# Altium PCB Example.PcbDoc (part 2 of 2)
Units mm, origin at the board's own origin, x right, y up, seen from the top; angles counter-clockwise.
Board outline 168.2 x 69.2 mm, 2 copper layers (Top Layer, Top, Bottom Layer, Bottom), stack 1.71 mm thick; 73 components, 24 nets, 188 pads, 846 vias.
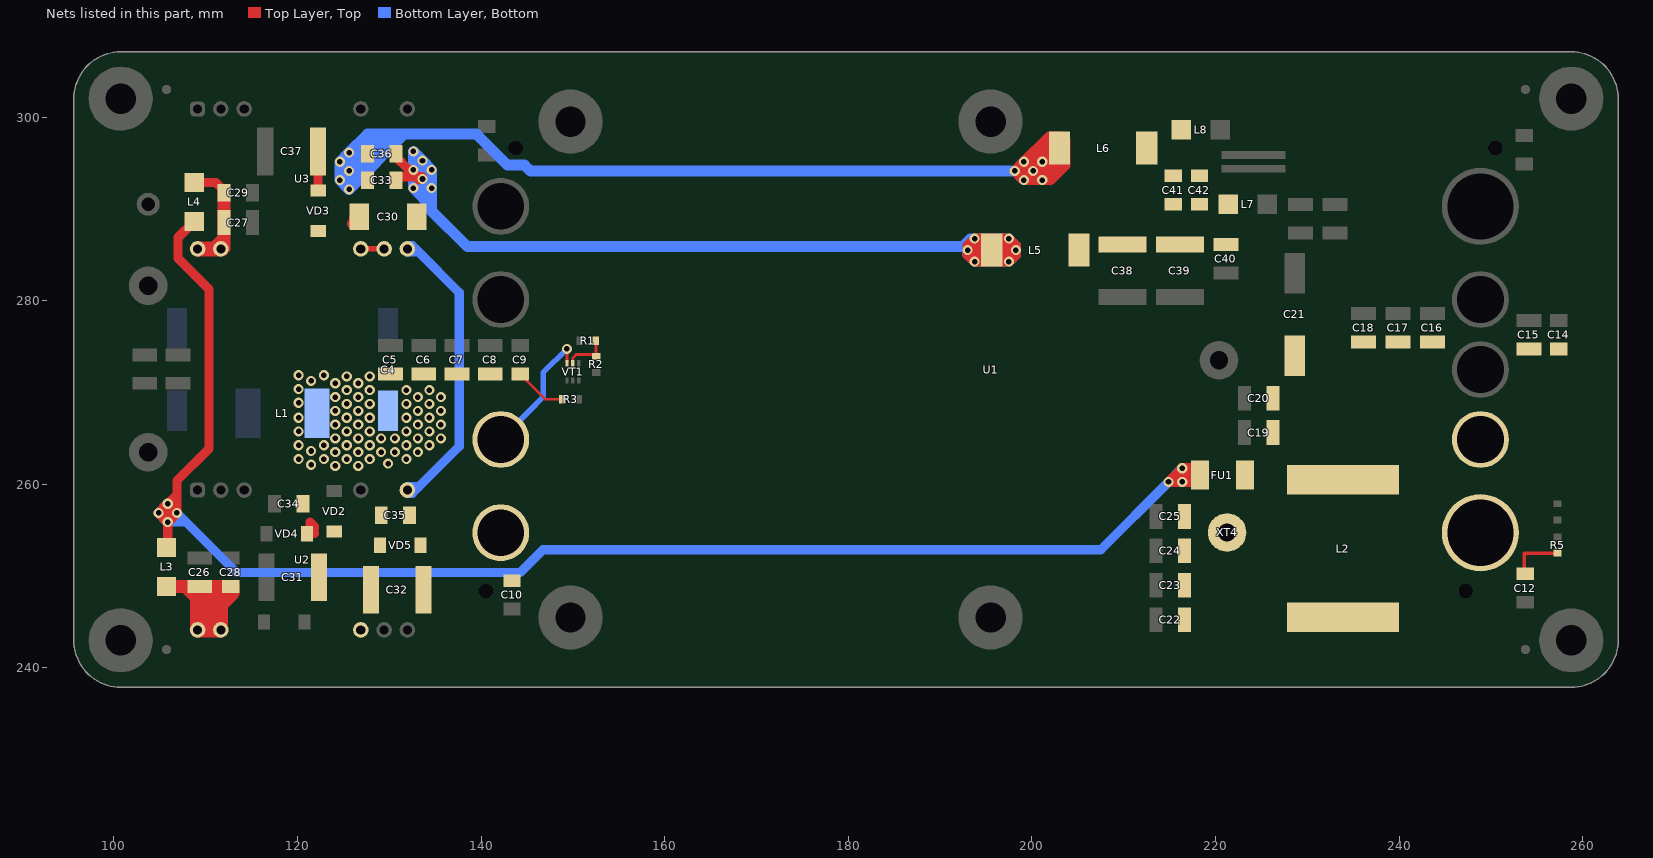
[diagram p2: the nets of this part, all layers, seen from the top]

## Via types
v1: diameter 1.1, hole 0.6, Top Layer, Top to Bottom Layer, Bottom, 846 vias

## Nets (pads, with @x,y where several pads share a name; then routed paths per layer and width w, separated by ;. In a path a pad name is that pad's centre, name@x,y a point inside that pad or via, vN(x,y) a via of type N, cw(c..) or ccw(c..) an arc to the next point about the centre after c; other vN are vias at no path point) (continued)
NET00006: C30.1 C32.2 C33.1 C35.2 C36.1 C37.2 L5.1 U2.11 U3.14 VD3.C VD5.A | length 182.8
  Top Layer, Top w1: VD3.C@122.25,292 C37.2@122.25,296.25 ; C33.1@130.75,293.125 130.5,293.375 130.5,293.5 133.125,293.5 ; C36.1@130.75,296 130.625,295.875 130.625,295.75 v1@132.188,294.187 ; v1@133.25,293.125 v1@133.375,293.25 ; v1@132.188,294.187 v1@132.25,294.125 ; v1@132.188,294.187 132.125,294.125 v1@132.25,294.125 ; v1@132.188,294.187 132.25,294.25 v1(132.625,294.25) v1@132.5,294.125 ; v1@132.25,294.125 v1@132.5,294.125 ; v1@132.5,294.125 133.125,293.5 ; 133.125,293.5 v1@133.375,293.5 ; v1@133.375,293.25 v1@133.5,293.375 ; v1@133.375,293.25 v1(133.625,293.25) ; v1@133.375,293.5 v1@133.625,293.5 ; v1@133.375,293.5 v1@133.5,293.375 ; v1@133.5,293.375 v1@133.625,293.5 ; v1@133.5,293.375 v1(133.625,293.25) ; v1(133.625,293.25) v1@133.625,293.5
  Top Layer, Top w1.1: v1@193.75,284.375 v1(193.75,284.25) ; L5.1@195.625,285.5 L5.1@195.625,285 ; v1@193,285 L5.1@195.625,285 ; v1@193,285 v1(193,285.5) v1@193,286 ; v1@193,285 v1(193.75,284.25) ; v1@193,286 v1@198.25,286 ; v1@193,286 v1(193.75,286.75) v1(197.5,286.75) v1@198.25,286 ; v1(193.75,284.25) L5.1@195.625,284.25 ; L5.1@195.625,284.25 v1(197.5,284.25) v1@198.25,285 ; L5.1@195.625,284.25 L5.1@195.625,285 ; L5.1@195.625,285 v1@198.25,285 ; v1@198.25,285 v1(198.25,285.5) v1@198.25,286
  Bottom Layer, Bottom w1: U3.14@131.99,285.635 U3.14@131.985,285.635 131.985,285.31 131.975,285.3 133.2,285.3 ; U3.14@131.99,285.635 132,285.625 U3.14@132,285.635 ; U3.14@131.99,285.635 U3.14@132,285.635 ; U3.14@132,285.635 132,285.975 132.525,285.975 132.865,285.635 ; U3.14@132,285.635 132.865,285.635 ; 132.865,285.635 133.2,285.3 ; 133.2,285.3 137.625,280.875 137.625,264.125 133.225,259.725 ; 133.225,259.725 132,259.725 131.985,259.71 U2.11@131.985,259.375 131.985,259.035 131.975,259.025 132.525,259.025 133.225,259.725
  Bottom Layer, Bottom w1.1: v1@133.125,294.25 v1(134.625,294.25) ; v1@133.375,293 v1(133.625,293.25) ; v1@192.625,285.875 192.5,286 ; v1(193.75,284.25) v1(197.5,284.25) v1@198.25,285 ; 192.5,286 193.25,286.75 v1(193.75,286.75) v1(197.5,286.75) v1@198.25,286 ; 192.5,286 v1@193,286 ; v1@193,286 v1@198.25,286 ; v1@193,286 193,285.875 v1(193,285.5) 193,285 v1@198.25,285 ; v1@198.25,285 v1(198.25,285.5) v1@198.25,286
  Bottom Layer, Bottom w1.2: v1@133.375,293 v1@133.625,292.75 ; 193.75,285.875 193,285.875 192.625,285.875 138.5,285.875 134.625,289.75 134.625,290.25 ; v1(132.625,294.25) v1(132.625,296.25) v1(133.625,295.25) v1(134.625,294.25) ; v1(132.625,294.25) v1(132.625,292.25) 134.625,290.25 ; v1(132.625,294.25) 133.125,294.25 v1@133.875,293.5 ; v1@133.625,292.75 v1@134.625,291.75 ; v1@133.625,292.75 v1(133.625,293.25) v1@133.875,293.5 ; v1@133.875,293.5 v1(134.625,294.25) ; 134.625,290.25 v1@134.625,291.75 ; v1@134.625,291.75 v1(134.625,292.25) v1(134.625,294.25)
NET00007: C31.2 C32.1 C34.2 C35.1 U2.16 VD2.C VD4.A VD5.C | length 3.8
  Top Layer, Top w1: VD4.A@121.025,254.625 VD4.A@121.375,254.975 ; 121.875,254.625 121.375,254.625 VD4.A@121.375,254.975 ; VD4.A@121.375,254.975 121.375,255.875 121.875,255.375 121.875,255.1 121.5,255.1 VD4.A@121.375,254.975
NET00009: C12.1 C14.1 C15.1 C16.1 C17.1 C18.1 C19.1 C20.1 C21.A FU1.2 L2.2 R5.2 U1.8 U1.9 | length 5.9
  Top Layer, Top w0.4: C12.1@253.75,250.25 253.625,250.375 253.625,252.5 R5.2@257.25,252.5
NET00010: C30.2 C33.2 C36.2 L6.1 U3.15 U3.16 VD3.A | length 160.3
  Top Layer, Top w0.6: U3.16@126.905,285.635 U3.15@129.44,285.635
  Top Layer, Top w1: C30.2@125.875,288.375 C30.2@126,288.375 ; U3.15@129.44,285.635 129.45,285.625 U3.15@129.445,285.635 ; C30.2@126,288.375 126.75,288.375 C30.2@126.75,289.125 ; C30.2@126,288.375 C30.2@126.125,288.5 ; C30.2@126,288.375 C30.2@126.125,288.5 ; C30.2@126.125,288.5 126.125,289.08 126.17,289.125 C30.2@126.75,289.125 ; C30.2@126.125,288.5 C30.2@126.75,289.125 ; U3.16@126.875,285.625 126.875,285.665 U3.16@126.905,285.635 126.885,285.635 U3.16@126.875,285.625
  Top Layer, Top w1.1: v1(198.125,294.125) v1(200.125,294.125) 201.375,294.125 201.5,294 201.857,294.327 L6.1@203,295.375 ; v1(198.125,294.125) v1(199.125,293.125) v1(201.125,293.125) 202,293.125 203.625,294.75 203.625,297.5 203.25,297.875 L6.1@203.125,297.875 ; v1(198.125,294.125) v1(199.125,295.125) ; v1(199.125,295.125) v1(201.125,295.125) ; v1(199.125,295.125) 201.875,297.875 L6.1@202.75,297.875 ; v1(201.125,295.125) v1@201.125,295.375 ; v1(201.125,295.125) v1@201.375,295.375 ; v1@201.125,295.375 v1@201.375,295.375 ; v1@201.125,295.375 200.375,295.375 200.375,295.5 200.562,295.688 202.25,297.375 L6.1@202.75,297.875 ; v1@201.375,295.375 202.875,296.875 202.875,296.75 L6.1@203,296.625 203,295.75 203.062,295.688 203.062,295.437 L6.1@203,295.375 ; v1@201.375,295.375 L6.1@203,295.375 ; L6.1@202.75,297.875 L6.1@203.125,297.875 ; L6.1@203,295.375 203.125,295.375 L6.1@203.125,297.875
  Bottom Layer, Bottom w1.1: v1(198.125,294.125) v1(200.125,294.125) 201.125,294.125 ; v1(198.125,294.125) v1(199.125,295.125) v1(201.125,295.125) 201.125,294.125 ; v1(198.125,294.125) v1(199.125,293.125) v1(201.125,293.125) 201.125,294.125
  Bottom Layer, Bottom w1.2: v1(198.125,294.125) 145.375,294.125 144.75,294.75 142.875,294.75 139.5,298.125 131.625,298.125 ; v1(125.625,292.125) v1(124.625,293.125) v1(124.625,295.125) v1(125.625,296.125) ; v1(125.625,292.125) 125.625,293 ; v1(125.625,292.125) 131.625,298.125 ; 125.625,293 v1(125.625,294.125) v1@125.625,294.5 ; 125.625,293 126.187,293.562 130.75,298.125 ; v1@125.625,294.5 v1(125.625,296.125) ; v1@125.625,294.5 126.437,295.313 129.25,298.125 ; v1(125.625,296.125) 127.625,298.125 129.25,298.125 ; 129.25,298.125 130.75,298.125 ; 130.75,298.125 131.625,298.125
NET00012: C27.1 C29.1 L4.2 U3.22 U3.23 | length 32.4
  Top Layer, Top w0.9: U3.22@111.635,285.635 U3.22@111.665,285.635 ; C27.1@112,288.5 112,285.875 111.76,285.635 U3.22@111.665,285.635 ; U3.23@109.125,285.625 109.125,285.25 U3.22@111.625,285.25 ; U3.23@109.125,285.625 U3.23@109.125,285.635 109.125,286 110.875,286 ; U3.23@109.125,285.625 110.5,285.625 ; 110.5,285.625 U3.22@111.625,285.625 ; 110.5,285.625 U3.22@111.625,285.635 ; 110.5,285.625 110.875,286 ; 110.875,286 111.625,286 U3.22@111.625,285.635 ; 110.875,286 111.75,286.875 111.75,291.75 111.75,292.25 112.25,292.25 112.25,285.625 112,285.375 112,285.5 111.875,285.5 111.837,285.462 U3.22@111.625,285.25 ; U3.22@111.625,285.25 U3.22@111.625,285.625 ; U3.22@111.625,285.625 U3.22@111.635,285.635 ; U3.22@111.625,285.625 U3.22@111.625,285.635 ; U3.22@111.625,285.635 U3.22@111.635,285.635 ; U3.22@111.635,285.635 U3.22@111.665,285.635
  Top Layer, Top w1: L4.2@108.75,292.875 111.125,292.875 111.75,292.25 112,292 C29.1@112,291.75
NET00013: C4.A C5.1 C6.1 C7.1 C8.1 C9.1 C10.1 L1.2 R3.1 U1.1 | length 5.8
  Top Layer, Top w0.3: C9.1@144.25,272 147,269.25 R3.1@148.875,269.25
  other v1: 124.125,262 126.625,262 121.5,262.125 129.875,262.25 120.125,262.75 122.875,262.75 125.375,262.75 127.875,262.75 131.875,262.75 124.125,263.5 126.625,263.5 129.125,263.5 130.625,263.5 133.125,263.5 121.5,263.625 120.125,264.25 122.875,264.25 125.375,264.25 127.875,264.25 131.875,264.25 134.375,264.25 124.125,265 126.625,265 129.125,265 130.625,265 133.125,265 135.625,265 120.125,265.75 125.375,265.75 127.875,265.75 131.875,265.75 134.375,265.75 124.125,266.5 126.625,266.5 133.125,266.5 135.625,266.5 120.125,267.25 125.375,267.25 127.875,267.25 131.875,267.25 134.375,267.25 124.125,268 126.625,268 133.125,268 135.625,268 125.375,268.75 127.875,268.75 131.875,268.75 134.375,268.75 120.125,268.875 124.125,269.5 126.625,269.5 133.125,269.5 135.625,269.5 125.375,270.25 127.875,270.25 131.875,270.25 134.375,270.25 120.125,270.375 124.125,271 126.625,271 121.5,271.25 125.375,271.75 127.875,271.75 120.125,271.875 122.875,271.875
NET00014: FU1.1 L3.1 L4.1 | length 189.2
  Top Layer, Top w1: L3.1@105.75,253.125 105.875,253.125 v1(105.875,255.875) ; v1(105.875,257.875) 106.875,258.875 ; v1(106.875,256.875) 106.875,258.875 ; L4.1@108.75,288.625 107,286.875 107,284.625 110.375,281.25 110.375,263.875 106.875,260.375 106.875,258.875
  Top Layer, Top w1.1: v1(105.875,255.875) v1(104.875,256.875) v1(105.875,257.875) ; v1(105.875,255.875) v1(106.875,256.875) v1(105.875,257.875) ; v1(105.875,255.875) v1(105.875,257.875) ; 215.75,261.125 v1(216.375,261.75) FU1.1@218.25,261.75 ; 215.75,261.125 v1(214.875,260.25) v1(216.375,260.25) 218.25,260.25 FU1.1@218.25,261.125 ; 215.75,261.125 FU1.1@218.25,261.125 ; FU1.1@218.25,261.125 FU1.1@218.272,261.147 ; FU1.1@218.25,261.125 FU1.1@218.25,261.17 ; FU1.1@218.25,261.17 FU1.1@218.25,261.75 ; FU1.1@218.25,261.17 FU1.1@218.272,261.147 ; FU1.1@218.25,261.75 218.295,261.705 FU1.1@218.295,261.17 ; FU1.1@218.272,261.147 FU1.1@218.295,261.17 ; FU1.1@218.272,261.147 218.272,261.023 FU1.1@218.295,261 FU1.1@218.295,261.17
  Bottom Layer, Bottom w1: v1(105.875,255.875) 107.875,255.875 ; v1(106.875,256.875) 107.875,255.875 ; v1(214.875,260.25) 207.5,252.875 146.75,252.875 144.25,250.375 113.375,250.375 107.875,255.875
  Bottom Layer, Bottom w1.1: v1(105.875,255.875) v1(104.875,256.875) v1(105.875,257.875) ; v1(105.875,255.875) v1(106.875,256.875) v1(105.875,257.875) ; v1(105.875,255.875) v1(105.875,257.875) ; v1(214.875,260.25) v1(216.375,260.25) v1(216.375,261.75) v1(214.875,260.25)
NET00015: R1.1 R2.2 VT1.2 | length 5.3
  Top Layer, Top w0.3: VT1.2@150,273.2 150,273.75 150.375,274.125 R2.2@152.525,274.125 ; R1.1@152.5,275.625 152.525,275.6 R2.2@152.525,274.125 ; R2.2@152.525,274.125 152.525,273.95 R2.2@152.55,273.925 152.6,273.975 152.6,274 152.625,274 152.625,274.125 R2.2@152.525,274.125
NET00024: C26.1 C28.1 L3.2 U2.22 U2.23 | length 32.4
  Top Layer, Top w1.4: L3.2@105.5,248.875 107.75,248.875 ; U2.22@111.665,244.135 111.74,244.135 U2.22@111.74,244.115 ; 107.75,248.875 109,247.625 ; 107.75,248.875 C26.1@108.5,248.875 ; C26.1@108.5,248.75 108.375,248.75 C26.1@108.5,248.875 ; C26.1@108.5,248.75 C26.1@108.625,248.75 ; C26.1@108.5,248.75 108.25,248.5 C26.1@108.875,248.5 ; C26.1@108.5,248.75 C26.1@108.625,248.875 ; C26.1@108.5,248.875 C26.1@108.625,248.875 ; C26.1@108.625,248.75 C26.1@108.75,248.875 ; C26.1@108.625,248.75 C26.1@108.875,248.75 ; C26.1@108.625,248.875 C26.1@108.75,248.875 ; C26.1@108.75,248.875 C26.1@108.875,248.75 ; C26.1@108.75,248.875 C26.1@109.375,248.875 ; C26.1@108.875,248.5 108.875,248.375 109,248.375 109,247.625 ; C26.1@108.875,248.5 C26.1@108.875,248.75 ; C26.1@108.875,248.5 C26.1@109.125,248.75 ; C26.1@108.875,248.75 C26.1@109.125,248.75 ; 109,247.625 109,244.125 U2.23@109.115,244.125 ; U2.23@109.115,244.125 U2.23@109.125,244.135 U2.23@109.125,244.115 ; U2.23@109.115,244.125 U2.23@109.125,244.115 ; U2.23@109.125,244.115 109.125,244 110.375,244 ; C26.1@109.125,248.75 109.25,248.75 C26.1@109.375,248.875 ; C26.1@109.375,248.875 C26.1@110.125,248.875 ; C26.1@110.125,248.875 110.375,248.625 110.375,244 ; C26.1@110.125,248.875 111.75,248.875 ; 110.375,244 111.625,244 U2.22@111.74,244.115 ; U2.22@111.74,244.115 111.75,244.125 111.75,246.875 ; 111.75,246.875 113,248.125 113,248.875 C28.1@112.75,248.875 111.75,248.875 ; 111.75,246.875 111.75,248.875
NET00029: U1.2 VT1.3 | length 14.4
  Top Layer, Top w0.3: VT1.3@149.35,273.2 v1(149.35,274.75)
  Bottom Layer, Bottom w0.6: U1.2@142.15,264.875 145.25,268 146.75,269.5 146.75,272.15 v1(149.35,274.75)
NET00031: C38.2 C39.2 C40.2 C41.1 C42.1 L5.2 L7.1
NET00032: C41.2 C42.2 L6.2 L8.1
OUT+27V: C22.1 C23.1 C24.1 C25.1 L2.1 XT4.1
pads on no net: U1.3 U1.12 U1.13 U1.14 U1.15 U2.4 U2.15 U3.2 U3.4 U3.9 U3.11
copper on no net: | length 4.4
  Top Layer, Top w1.1: 193,285 193.75,284.25 193,285
  Bottom Layer, Bottom w1.1: 192.125,285.875 193,285 193.75,284.25

## Polygon pours and split planes (outlines as drawn)
no net on Top Layer, Top "Top Layer, Top-GND 8" (solid, pour order 108): 106.553,233.45 103.803,233.45 103.803,224.325
IN-27V on Top Layer, Top "Top Layer, Top-IN-27V" (solid, pour order 0): 144.125,293.875 144.125,294.25 142.375,296 139,296 137.25,294.25 137.25,293.875
GND on Top Layer, Top "Top Layer, Top-GND" (solid, pour order 2): 257.25,293 257.25,293.375 255.625,295 251.625,295 251.625,294 252.625,293
NET00009 on Top Layer, Top "Top Layer, Top-NET00009" (solid, pour order 4): 258.5,273 258.5,275.375 258.375,275.5 252.625,275.5 252.5,275.375 252.5,273.5 252.75,273.25 253,273.25 253,273.375 252.875,273.5 252.875,273.875 253,274 253.75,274 253.875,273.875 253.875,273.5 253.75,273.375 253.75,273.25 254.375,273.25 254.375,273.375 254.25,273.5 254.25,273.875 254.375,274 255.125,274 255.25,273.875 255.25,273.5 255.125,273.375 255.125,273.25 255.875,273.25 255.875,273.375 255.75,273.5 255.75,273.875 255.875,274 256.625,274 256.75,273.875 256.75,273.5 256.625,273.375 256.625,273.25 257.25,273.25 257.25,273.375 257.125,273.5 257.125,273.875 257.25,274 258,274 258.125,273.875 258.125,273.5 258,273.375 258,272.875 258.375,272.875
NET00009 on Top Layer, Top "Top Layer, Top-NET00009 1" (solid, pour order 6): 251.75,252.125 251.75,250.125 255.375,250.125 256,250.75 256,252.125
NET00006 on Top Layer, Top "Top Layer, Top-NET00006" (solid, pour order 8): 131.25,259.375 131.25,258.5 131.625,258.125 131.625,256.375 131.875,256.125 131.875,246.75 132.625,246 134.5,246 134.625,246.125 134.625,257.75 132.625,259.75 131.625,259.75
OUT+27V on Top Layer, Top "Top Layer, Top-OUT+27V" (solid, pour order 10): 216.375,243.25 216.625,243 219.5,243 219.5,258 218.875,258.625 216.5,258.625 216.375,258.5
GND on Top Layer, Top "Top Layer, Top-GND 1" (solid, pour order 12): 259.875,245.125 263.125,245.125 263.125,298.75 259.875,298.75 259.875,291.75 259.875,263.75
GND on Top Layer, Top "Top Layer, Top-GND 2" (solid, pour order 14): 144.375,297.875 144.375,298.625 144.375,304.625 132.75,304.625 132.75,303.5 138.625,297.625 142.625,297.625 142.875,297.875
GND on Top Layer, Top "Top Layer, Top-GND 3" (solid, pour order 16): 258.375,277.125 258.5,277.25 258.5,279.375 258,279.375 258,279.25 258.125,279.125 258.125,278.75 258,278.625 256.875,278.625 256.75,278.75 256.75,279.125 256.875,279.25 256.875,279.375 256.25,279.375 256.25,279.25 256.375,279.125 256.375,278.75 256.25,278.625 255,278.625 254.875,278.75 254.875,279.125 255.125,279.375 255.125,279.5 254.25,279.5 254.25,279.375 254.5,279.125 254.5,278.75 254.375,278.625 253.125,278.625 253,278.75 253,279.125 253.25,279.375 253.25,279.5 252.375,279.5 252.375,279.375 252.625,279.125 252.625,277.625 252.5,277.5 252.125,277.5 251.875,277.75 251.375,277.75 251.375,277.125
IN+27V on Top Layer, Top "Top Layer, Top-IN+27V" (solid, pour order 18): 108.5,271.625 108.375,271.75 101.875,271.75 101.75,271.625 101.75,263.5 103.75,261.5 105.25,261.5 108.5,264.75
GND on Top Layer, Top "Top Layer, Top-GND 4" (solid, pour order 20): 114.5,284.875 115.125,284.875 117.25,287 117.25,298.75 113.625,298.75 112.375,300 112.375,300.875 111,300.875 111,296.5 114.5,293
GND on Top Layer, Top "Top Layer, Top-GND 5" (solid, pour order 22): 109,303.875 109,306.375 99.5,306.375 98,305.875 96.875,304.75 96.375,303.25 96.375,293.75 98.875,293.75
NET00013 on Top Layer, Top "Top Layer, Top-NET00013" (solid, pour order 24): 139.75,251.5 139.75,251.125 141.5,249.375 145.125,249.375 146.75,251 146.75,251.5
NET00009 on Top Layer, Top "Top Layer, Top-NET00009 2" (solid, pour order 26): 245.75,275.625 245.625,275.75 234.375,275.75 233.75,276.375 231,276.375 230.375,277 227,277 226,275.875 226,261.75 234.625,261.75 234.625,268.75 234.875,269 245,269 245,273.75 245.75,274.5
NET00009 on Top Layer, Top "Top Layer, Top-NET00009 3" (solid, pour order 28): 226.875,258.75 239.875,258.75 240,258.875 240,262.625 234.125,268.5 227.875,268.5 227.875,264.25 225.625,262 223.125,262 223.125,260 225.625,260
GND on Top Layer, Top "Top Layer, Top-GND 6" (solid, pour order 30): 251.625,303.375 260,295 263.125,295 263.125,303.25 262.625,304.75 261.5,305.875 260,306.375 251.625,306.375
GND on Top Layer, Top "Top Layer, Top-GND 7" (solid, pour order 32): 258.75,296.625 258.75,297.25 254.125,301.875 251.125,301.875 251.125,298.25 251.875,297.5 251.875,297 252.25,296.625
GND on Top Layer, Top "Top Layer, Top-GND 8" (solid, pour order 34): 99.125,250.875 96.375,250.875 96.375,241.75 96.875,240.25 98,239.125 99.5,238.625 108.5,238.625 108.5,241.5
GND on Top Layer, Top "Top Layer, Top-GND 9" (solid, pour order 36): 108.15,251.4 113.875,251.4 114.825,250.45 114.825,244.8 115.5,244.125 117.275,244.125 118.075,244.925 118.075,258.7 116.1,258.7 115.025,257.625 113.4,257.625 112.4,258.625 112.4,262.55 111.875,262.55 108.45,259.125 108.45,254.3 108.15,254
IN-27V on Top Layer, Top "Top Layer, Top-IN-27V 1" (solid, pour order 38): 108.5,280.25 105.125,283.625 103.75,283.625 101.75,281.625 101.75,273.5 101.875,273.375 108.375,273.375 108.5,273.5
GND on Top Layer, Top "Top Layer, Top-GND 10" (solid, pour order 40): 145.375,247.75 141.875,247.75 136,241.875 136,240.5 145.375,240.5
GND on Top Layer, Top "Top Layer, Top-GND 11" (solid, pour order 42): 211.875,259.125 211.875,241 216.25,241 216.25,241.625 215,242.875 215,258.375 213.625,259.75 212.5,259.75
OUT+27V on Top Layer, Top "Top Layer, Top-OUT+27V 1" (solid, pour order 44): 218.375,243 239.25,243 240,243.75 240,247.75 237.5,250.25 221.75,250.25 221.625,250.375 221.625,250.75 221.75,250.875 223.875,250.875 225.25,252.25 225.25,256.875 223.5,258.625 218.375,258.625
GND on Top Layer, Top "Top Layer, Top-GND 12" (solid, pour order 46): 251.375,241.375 251.375,238.625 260,238.625 261.5,239.125 262.625,240.25 263.125,241.75 263.125,250.25 260.25,250.25
GND on Top Layer, Top "Top Layer, Top-GND 13" (solid, pour order 48): 96.375,246.75 99.625,246.75 99.625,296 96.375,296
NET00006 on Top Layer, Top "Top Layer, Top-NET00006 1" (solid, pour order 50): 130.125,291.625 131.375,290.375 131.375,285.625 131.875,285.125 132.5,285.125 135.125,287.75 135.125,294.375 130.375,299.125 123.5,299.125 121.75,297.375 121.75,295.5 122.625,295.5 124.875,297.75 129.5,297.75 130.125,297.125
NET00010 on Top Layer, Top "Top Layer, Top-NET00010" (solid, pour order 52): 121.625,288.125 121.625,287.125 124.375,287.125 126.375,285.125 127.125,285.125 127.625,285.625 127.625,287.125 128.25,287.75 128.25,296.75 125.625,296.75 124.125,295.25 124.125,289.125 123.125,288.125
NET00009 on Top Layer, Top "Top Layer, Top-NET00009 4" (solid, pour order 54): 234.375,274 234.375,272.125 242.625,263.875 242.625,253.75 246.25,250.125 252.125,250.125 252.125,251.375 252.625,251.875 256,251.875 256,252.25 256.25,252.5 256,252.75 256,260.125 258.5,262.625 258.5,273.375 252.75,273.375 252.75,274.125 252.5,274.125 252.5,272.625 245.75,272.625 245.75,274.875 245.375,274.875 245.375,274
NET00032 on Top Layer, Top "Top Layer, Top-NET00032" (solid, pour order 56): 211.875,299.625 211.375,299.125 211.375,295 213.375,293 219.125,293 219.125,295.375 217.25,297.25 217.25,299.625
GND on Top Layer, Top "Top Layer, Top-GND 14" (solid, pour order 58): 231,297 236.375,291.625 240.5,291.625 247,298.125 252.125,298.125 252.125,299.125 253.375,299.125 253.375,301.5 249.25,305.625 210,305.625 210,304.25 212.5,301.75 227.75,301.75 231,298.5
NET00031 on Top Layer, Top "Top Layer, Top-NET00031" (solid, pour order 60): 213.375,285.25 222.375,285.25 222.5,285.375 222.5,291.5 214.25,291.5 210,287.25 205,287.25 205,284.375 206,284.375 206.375,284.75 212.875,284.75
NET00007 on Top Layer, Top "Top Layer, Top-NET00007" (solid, pour order 62): 120,258.75 120,256.625 120.375,256.25 120.375,253.375 121.375,252.375 121.375,247.375 124.125,247.375 126.125,245.375 126.125,244.125 126.625,243.625 127.125,243.625 127.625,244.125 127.625,244.75 128.875,246 128.875,251.375 129.625,252.125 129.625,257.5 122.625,257.5 121.375,258.75
GND on Top Layer, Top "Top Layer, Top-GND 15" (solid, pour order 64): 259,243.25 259,248.5 250.5,248.5 243.625,241.625 251.5,241.625 253.125,243.25
GND on Top Layer, Top "Top Layer, Top-GND 16" (solid, pour order 66): 247,295 243.875,291.875 243.875,284 243.25,283.375 243.25,281.875 245.5,279.625 245.5,277.125 251.625,277.125 252,277.5 252,279.125 252.125,279.25 258.5,279.25 258.5,292.125 257.125,293.5 252.5,293.5 252.125,293.875 252.125,295
GND on Top Layer, Top "Top Layer, Top-GND 17" (solid, pour order 68): 245.625,283.5 239.375,283.5 235.25,287.625 227.25,287.625 222.875,283.25 215.625,283.25 214.5,282.125 206.75,282.125 203.5,278.875 203.5,278 216.875,278 216.875,272.375 220,269.25 220,263.5 224.25,263.5 224.625,263.875 224.625,271.25 225.125,271.75 225.125,276.125 226.625,277.625 230.75,277.625 231.25,277.125 245.625,277.125 245.625,279.375
GND on Top Layer, Top "Top Layer, Top-GND 18" (solid, pour order 70): 145.125,295.5 149.625,291 149.625,278.875 151.5,277 152.875,277 153.625,276.25 153.625,271.5 151.75,269.625 151.75,268.375 149.125,265.75 149.125,252.125 144.75,247.75 144.75,241 212.125,241 212.125,258.5 213.75,258.5 213.75,261.125 216.125,263.5 221.125,263.5 221.125,268.75 217.375,272.5 217.375,278.625 206.875,278.625 206,279.5 197.75,279.5 194.875,282.375 193,282.375 191.125,284.25 191.125,286.75 195.875,291.5 195.875,295 204.125,303.25 204.125,304.125 143.25,304.125 143.25,297.875 144.375,297.875 145.125,297.125
GND on Top Layer, Top "Top Layer, Top-GND 19" (solid, pour order 72): 100.75,241.875 100.75,238.625 258.75,238.625 258.75,241.875
NET00013 on Top Layer, Top "Top Layer, Top-NET00013 1" (solid, pour order 74): 119.5,272 119.5,262.5 120.5,261.5 133.625,261.5 136.125,264 136.125,269.625 136.25,269.75 136.625,269.75 136.75,269.625 136.75,254.125 140,250.875 146.625,250.875 148.25,252.5 148.25,267.875 147.875,268.25 147.875,269 148.125,269.25 147.875,269.5 147.875,271.75 146.875,272.75 120.25,272.75
GND on Top Layer, Top "Top Layer, Top-GND 20" (solid, pour order 76): 100.75,306.375 100.75,303.125 258.75,303.125 258.75,306.375
IN-27V on Top Layer, Top "Top Layer, Top-IN-27V 2" (solid, pour order 78): 143.875,294.5 137.5,294.5 136.75,293.75 136.75,278.25 136.625,278.125 136.25,278.125 136.125,278.25 136.125,282.375 134.875,283.625 118.75,283.625 118.375,283.25 118.375,275.25 119.375,274.25 147.625,274.25 147.875,274 148.25,274.375 148.25,290.125
IN+27V on Bottom Layer, Bottom "Bottom Layer, Bottom-IN+27V" (solid, pour order 80): 115.625,271.375 103.625,271.375 101.75,269.5 101.75,263.375 103.75,261.375 113.625,261.375 116.25,264 116.25,270.75
GND on Bottom Layer, Bottom "Bottom Layer, Bottom-GND" (solid, pour order 82): 108.5,306.375 98.875,306.375 97.375,305.375 96.375,303.875 96.375,302.375 96.375,294.375 99.375,294.375 108.5,303.625
NET00029 on Bottom Layer, Bottom "Bottom Layer, Bottom-NET00029" (solid, pour order 84): 139,266.75 139,263 140.5,261.5 144,261.5 145.75,263.25 145.75,268.5 140.75,268.5
GND on Bottom Layer, Bottom "Bottom Layer, Bottom-GND 1" (solid, pour order 86): 263.125,298.875 263.125,303.875 262.125,305.375 260.625,306.375 259.125,306.375 251.625,306.375 251.625,303.375 256.125,298.875
GND on Bottom Layer, Bottom "Bottom Layer, Bottom-GND 2" (solid, pour order 88): 96.375,250.625 96.375,241.125 97.375,239.625 98.875,238.625 100.375,238.625 108.5,238.625 108.5,241.5 99.375,250.625
GND on Bottom Layer, Bottom "Bottom Layer, Bottom-GND 3" (solid, pour order 90): 251.125,238.625 260.625,238.625 262.125,239.625 263.125,241.125 263.125,242.625 263.125,250.375 260.375,250.375 251.125,241.125
GND on Bottom Layer, Bottom "Bottom Layer, Bottom-GND 4" (solid, pour order 92): 96.375,297.625 96.375,243.875 97.25,243 106.875,243 106.875,252.375 99.625,259.625 99.625,297.625
GND on Bottom Layer, Bottom "Bottom Layer, Bottom-GND 5" (solid, pour order 94): 254.375,301.375 254.375,264.125 258.375,260.125 258.375,259.125 254.375,255.125 254.375,243.625 263.125,243.625 263.125,301.375
NET00013 on Bottom Layer, Bottom "Bottom Layer, Bottom-NET00013" (solid, pour order 96): 134.5,272.75 120.25,272.75 119.5,272 119.5,262.5 120.5,261.5 132.875,261.5 136.125,264.75 136.125,271.125
IN-27V on Bottom Layer, Bottom "Bottom Layer, Bottom-IN-27V" (solid, pour order 98): 132.25,283.625 127.25,283.625 103.75,283.625 101.75,281.625 101.75,275.625 103.625,273.75 134.5,273.875 136.125,275.5 136.125,279.75
GND on Bottom Layer, Bottom "Bottom Layer, Bottom-GND 6" (solid, pour order 100): 256.5,241.875 100.75,241.875 100.75,238.625 256.5,238.625
GND on Bottom Layer, Bottom "Bottom Layer, Bottom-GND 7" (solid, pour order 102): 258.625,306.375 100.625,306.375 100.625,303.125 258.625,303.125
GND on Bottom Layer, Bottom "Bottom Layer, Bottom-GND 8" (solid, pour order 104): 139,305.375 139,303.5 146.5,296 197.375,296 198.375,297 201.875,297 203,295.875 203,292.375 201.875,291.25 198.375,291.25 197.375,292.25 148.625,292.25 148.375,292 148.375,288 148.625,287.75 191.625,287.75 192.5,288.625 198.25,288.625 200.125,286.75 200.125,281.875 222.125,281.875 243.625,281.875 243.625,292.5 249.125,298 251.25,298 254.5,294.75 255.25,294.75 255.25,305.25
GND on Bottom Layer, Bottom "Bottom Layer, Bottom-GND 9" (solid, pour order 106): 215.625,263 217,263 217.625,262.375 217.625,259.375 217.125,258.875 215.5,258.875 208.25,251.625 147.5,251.625 137.625,241.75 137.625,241 255.875,240.875 255.875,253.125 254.875,253.125 248.75,247 246.5,247 243.625,249.875 243.625,285.75 201.625,285.75 198.25,282.375 193,282.375 191.375,284 149.375,284 149.125,283.75 149.125,279.25 150.75,277.625 150.75,266.375 143.625,259.25 143.625,258.875 146.125,256.375 146.125,254.375 146.375,254.125 206.75,254.125

## Keep-outs
Keep-Out Layer, Board:
  lines w0.127: 95.75,243 ccw(c100.75,243) 100.75,238 258.75,238 ccw(c258.75,243) 263.75,243 263.75,302 ccw(c258.75,302) 258.75,307 100.75,307 ccw(c100.75,302) 95.75,302 95.75,243
  lines w0.2: 95.75,243 ccw(c100.75,243) 100.75,238 258.75,238 ccw(c258.75,243) 263.75,243 263.75,302 ccw(c258.75,302) 258.75,307 100.75,307 ccw(c100.75,302) 95.75,302 95.75,243

## Other copper
Top Layer, Top:
  pour cut-out: 253.75,243.1 253.465,243.063 253.2,242.953 252.972,242.778 252.797,242.55 252.687,242.285 252.65,242 252.687,241.715 252.797,241.45 252.972,241.222 253.2,241.047 253.465,240.937 253.75,240.9 254.035,240.937 254.3,241.047 254.528,241.222 254.703,241.45 254.813,241.715 254.85,242 254.813,242.285 254.703,242.55 254.528,242.778 254.3,242.953 254.035,243.063
  pour cut-out: 253.75,304.1 253.465,304.063 253.2,303.953 252.972,303.778 252.797,303.55 252.687,303.285 252.65,303 252.687,302.715 252.797,302.45 252.972,302.222 253.2,302.047 253.465,301.937 253.75,301.9 254.035,301.937 254.3,302.047 254.528,302.222 254.703,302.45 254.813,302.715 254.85,303 254.813,303.285 254.703,303.55 254.528,303.778 254.3,303.953 254.035,304.063
  pour cut-out: 105.75,243.1 105.465,243.063 105.2,242.953 104.972,242.778 104.797,242.55 104.687,242.285 104.65,242 104.687,241.715 104.797,241.45 104.972,241.222 105.2,241.047 105.465,240.937 105.75,240.9 106.035,240.937 106.3,241.047 106.528,241.222 106.703,241.45 106.813,241.715 106.85,242 106.813,242.285 106.703,242.55 106.528,242.778 106.3,242.953 106.035,243.063
  pour cut-out: 105.75,304.1 105.465,304.063 105.2,303.953 104.972,303.778 104.797,303.55 104.687,303.285 104.65,303 104.687,302.715 104.797,302.45 104.972,302.222 105.2,302.047 105.465,301.937 105.75,301.9 106.035,301.937 106.3,302.047 106.528,302.222 106.703,302.45 106.813,302.715 106.85,303 106.813,303.285 106.703,303.55 106.528,303.778 106.3,303.953 106.035,304.063
Bottom Layer, Bottom:
  pour cut-out: 252.65,242 252.66,241.857 252.687,241.715 252.733,241.581 252.798,241.45 252.877,241.331 252.972,241.222 253.079,241.129 253.2,241.048 253.329,240.984 253.465,240.937 253.607,240.909 253.75,240.9 253.895,240.91 254.035,240.937 254.171,240.984 254.3,241.047 254.42,241.128 254.528,241.222 254.623,241.331 254.703,241.45 254.766,241.579 254.812,241.715 254.84,241.855 254.85,242 254.84,242.145 254.813,242.285 254.766,242.422 254.703,242.55 254.622,242.67 254.528,242.778 254.42,242.872 254.3,242.953 254.171,243.016 254.035,243.063 253.893,243.091 253.75,243.1 253.607,243.091 253.465,243.063 253.329,243.016 253.2,242.953 253.081,242.873 252.972,242.778 252.877,242.669 252.797,242.55 252.734,242.421 252.687,242.285 252.66,242.143
  pour cut-out: 252.65,303 252.66,302.857 252.687,302.715 252.733,302.581 252.798,302.45 252.877,302.331 252.972,302.222 253.079,302.129 253.2,302.048 253.329,301.984 253.465,301.937 253.607,301.909 253.75,301.9 253.895,301.91 254.035,301.937 254.171,301.984 254.3,302.047 254.42,302.128 254.528,302.222 254.623,302.331 254.703,302.45 254.766,302.579 254.812,302.715 254.84,302.855 254.85,303 254.84,303.145 254.813,303.285 254.766,303.422 254.703,303.55 254.622,303.67 254.528,303.778 254.42,303.872 254.3,303.953 254.171,304.016 254.035,304.063 253.893,304.091 253.75,304.1 253.607,304.091 253.465,304.063 253.329,304.016 253.2,303.953 253.081,303.873 252.972,303.778 252.877,303.669 252.797,303.55 252.734,303.421 252.687,303.285 252.66,303.143
  pour cut-out: 104.65,242 104.66,241.857 104.687,241.715 104.733,241.581 104.798,241.45 104.877,241.331 104.972,241.222 105.079,241.129 105.2,241.048 105.329,240.984 105.465,240.937 105.607,240.909 105.75,240.9 105.895,240.91 106.035,240.937 106.171,240.984 106.3,241.047 106.42,241.128 106.528,241.222 106.623,241.331 106.703,241.45 106.766,241.579 106.812,241.715 106.84,241.855 106.85,242 106.84,242.145 106.813,242.285 106.766,242.422 106.703,242.55 106.622,242.67 106.528,242.778 106.42,242.872 106.3,242.953 106.171,243.016 106.035,243.063 105.893,243.091 105.75,243.1 105.607,243.091 105.465,243.063 105.329,243.016 105.2,242.953 105.081,242.873 104.972,242.778 104.877,242.669 104.797,242.55 104.734,242.421 104.687,242.285 104.66,242.143
  pour cut-out: 104.65,303 104.66,302.857 104.687,302.715 104.733,302.581 104.798,302.45 104.877,302.331 104.972,302.222 105.079,302.129 105.2,302.048 105.329,301.984 105.465,301.937 105.607,301.909 105.75,301.9 105.895,301.91 106.035,301.937 106.171,301.984 106.3,302.047 106.42,302.128 106.528,302.222 106.623,302.331 106.703,302.45 106.766,302.579 106.812,302.715 106.84,302.855 106.85,303 106.84,303.145 106.813,303.285 106.766,303.422 106.703,303.55 106.622,303.67 106.528,303.778 106.42,303.872 106.3,303.953 106.171,304.016 106.035,304.063 105.893,304.091 105.75,304.1 105.607,304.091 105.465,304.063 105.329,304.016 105.2,303.953 105.081,303.873 104.972,303.778 104.877,303.669 104.797,303.55 104.734,303.421 104.687,303.285 104.66,303.143
  pour cut-out: 219.13,256.87 218.94,256.665 218.76,256.425 218.615,256.185 218.485,255.92 218.38,255.62 218.305,255.335 218.265,255.05 218.25,254.75 218.265,254.455 218.305,254.165 218.385,253.865 218.485,253.58 218.61,253.325 218.76,253.075 218.935,252.84 219.13,252.63 219.335,252.44 219.575,252.26 219.825,252.11 220.08,251.985 220.37,251.88 220.665,251.805 220.95,251.765 221.25,251.75 221.545,251.765 221.835,251.805 222.14,251.885 222.42,251.985 222.685,252.115 222.925,252.26 223.14,252.42 223.37,252.625 223.565,252.84 223.74,253.075 223.89,253.325 224.015,253.58 224.12,253.875 224.195,254.165 224.235,254.455 224.25,254.75 224.235,255.05 224.195,255.335 224.115,255.64 224.015,255.92 223.89,256.175 223.74,256.425 223.56,256.665 223.37,256.87 223.16,257.065 222.925,257.24 222.675,257.39 222.42,257.515 222.14,257.615 221.83,257.695 221.545,257.735 221.25,257.75 220.955,257.735 220.665,257.695 220.375,257.62 220.08,257.515 219.825,257.39 219.575,257.24 219.34,257.065
  pour cut-out: 222.9,273.5 222.897,273.621 222.889,273.737 222.874,273.856 222.855,273.975 222.829,274.095 222.798,274.213 222.759,274.332 222.715,274.45 222.664,274.564 222.609,274.678 222.547,274.787 222.48,274.895 222.409,274.996 222.332,275.095 222.249,275.191 222.16,275.285 222.07,275.371 221.975,275.454 221.875,275.53 221.77,275.605 221.664,275.67 221.556,275.732 221.441,275.789 221.325,275.84 221.209,275.884 221.093,275.921 220.973,275.953 220.855,275.98 220.735,275.999 220.616,276.013 220.495,276.022 220.375,276.025 220.249,276.022 220.124,276.013 219.999,275.997 219.875,275.975 219.751,275.947 219.631,275.913 219.514,275.874 219.4,275.83 219.287,275.779 219.177,275.723 219.07,275.662 218.965,275.595 218.866,275.525 218.769,275.449 218.677,275.369 218.59,275.285 218.503,275.195 218.42,275.098 218.343,274.999 218.27,274.895 218.205,274.791 218.145,274.684 218.089,274.573 218.04,274.46 217.996,274.347 217.958,274.232 217.926,274.117 217.9,274 217.878,273.875 217.862,273.75 217.853,273.626 217.85,273.5 217.853,273.381 217.861,273.262 217.875,273.143 217.895,273.025 217.919,272.911 217.95,272.796 217.985,272.684 218.025,272.575 218.075,272.458 218.131,272.343 218.192,272.23 218.26,272.12 218.333,272.014 218.413,271.91 218.498,271.811 218.59,271.715 218.68,271.628 218.775,271.546 218.874,271.469 218.98,271.395 219.082,271.331 219.196,271.267 219.309,271.21 219.425,271.16 219.531,271.12 219.647,271.082 219.76,271.051 219.875,271.025 219.998,271.003 220.124,270.987 220.249,270.978 220.375,270.975 220.492,270.977 220.612,270.986 220.731,271 220.85,271.02 220.969,271.046 221.09,271.078 221.207,271.116 221.325,271.16 221.438,271.21 221.552,271.266 221.66,271.327 221.77,271.395 221.873,271.467 221.972,271.544 222.067,271.626 222.16,271.715 222.248,271.807 222.33,271.902 222.407,272.002 222.48,272.105 222.547,272.213 222.609,272.323 222.664,272.435 222.715,272.55 222.758,272.666 222.797,272.785 222.83,272.908 222.855,273.025 222.875,273.142 222.889,273.262 222.898,273.383

## Silkscreen, mask and mechanical layers (free items; w line width, h text height)
Top Overlay, Top Silk:
  circle w0.2: c103.75,263.5 r2.5
  circle w0.2: c103.75,281.625 r2.5
  circle w0.2: c103.75,290.5 r1.7
  circle w0.2: c221.25,254.75 r2.5
  circle w0.2: c220.375,273.5 r2.5
  lines w0.15: 101.75,273.875 101.75,275.125 ; 117.375,245 119.75,245 ; 117.625,254.625 120,254.625 ; 117.875,244.125 117.875,245.875 ; 118.125,253.75 118.125,255.5 ; 121.375,290.5 123.125,290.5 ; 122.25,288.625 122.25,291 ; 123.125,256.375 124.875,256.375 ; 124,255.875 124,258.25 ; 130,253.375 132.375,253.375 ; 130.5,252.5 130.5,254.25 ; 117.875,245 119.375,245.875 119.375,244.125 117.875,245 ; 118.125,254.625 119.625,255.5 119.625,253.75 118.125,254.625 ; 121.375,289 123.125,289 122.25,290.5 121.375,289 ; 123.125,257.875 124,256.375 124.875,257.875 123.125,257.875 ; 130.5,253.375 132,254.25 132,252.5 130.5,253.375
  lines w0.2: 121.75,285.75 122.75,285.75 ; 122,246 123,246 ; 122.25,285.25 122.25,286.25 ; 122.5,245.5 122.5,246.5 ; 123,261.125 124,261.125 ; 123.5,260.625 123.5,261.625 ; 134.875,254.25 135.875,254.25 ; 135.375,253.75 135.375,254.75 ; 230.125,293.75 235.625,293.75 235.625,296.625 230.125,296.625 230.125,293.75
  text "ПИТ" at 230.625,293.875 h2.47
  text "ВКЛ" at 101.375,292.25 h2.82
  text "J1" at 146.125,289.375 h2.82
  text "J2" at 149,289.375 h2.82
  text "-ПИТ" at 100,284 h3.17
  text "ОБЩ" at 210.5,272 h3.17
  text "КСФТ.758726.005_v4" at 160.84,258.111 h4.23
  text "+ПИТ" at 100,257.75 h3.17
  text "+28В" at 218,249 h3.17
Top Solder, Top Mask:
  drawing of 22 lines, arcs and shapes, not listed
Bottom Solder, Bot Mask:
  circle w1: c253.75,242 r0.5
  circle w1: c253.75,303 r0.5
  circle w1: c105.75,242 r0.5
  circle w1: c105.75,303 r0.5
  region: 263.75,248.25 263.75,297.25 259.625,297.25 259.625,248.25
  region: 108.625,307 100.75,307 99.375,306.75 98.125,306.25 97.25,305.5 96.5,304.5 96,303.375 95.75,302 95.75,294 99.375,294 108.625,303.25
  region: 263.75,294.625 263.75,302 263.5,303.375 263,304.625 262.25,305.5 261.25,306.25 260.125,306.75 258.75,307 251.125,307 251.125,303.5 260,294.625
  region: 95.75,251 95.75,243 96,241.625 96.5,240.375 97.25,239.5 98.25,238.75 99.375,238.25 100.75,238 108.75,238 108.75,241.625 99.375,251
  region: 250.875,238 258.75,238 260.125,238.25 261.375,238.75 262.25,239.5 263,240.5 263.5,241.625 263.75,243 263.75,250.5 260.125,250.5 250.875,241.25
  region: 95.75,296 95.75,244 99.875,244 99.875,296
  region: 257.5,242.125 143.375,242.125 100.75,242.125 100.75,238 257.5,238
  region: 257.5,307 100.75,307 100.75,302.875 143.75,302.875 257.5,302.875

## Text inside footprints (layer, text, board x,y; h text height)
C3: Bottom Overlay, Bot Silk "+" at 110.7,266.85 h3.17 r90
C4: Bottom Overlay, Bot Silk "+" at 134.075,266.85 h3.17 r90
C21: Top Overlay, Top Silk "+" at 229.2,272.875 h3.17 r270